# Altium PCB DIOT_Template.PcbDoc (part 2 of 4)
Units mm, origin at the board's own origin, x right, y up, seen from the top; angles counter-clockwise.
Board outline 222.9 x 100 mm, 4 copper layers (L1, P2, P3, L4), stack 1.546 mm thick; 233 components, 184 nets, 1067 pads, 325 vias.
Unrouted connection lines stored in the file: 423.
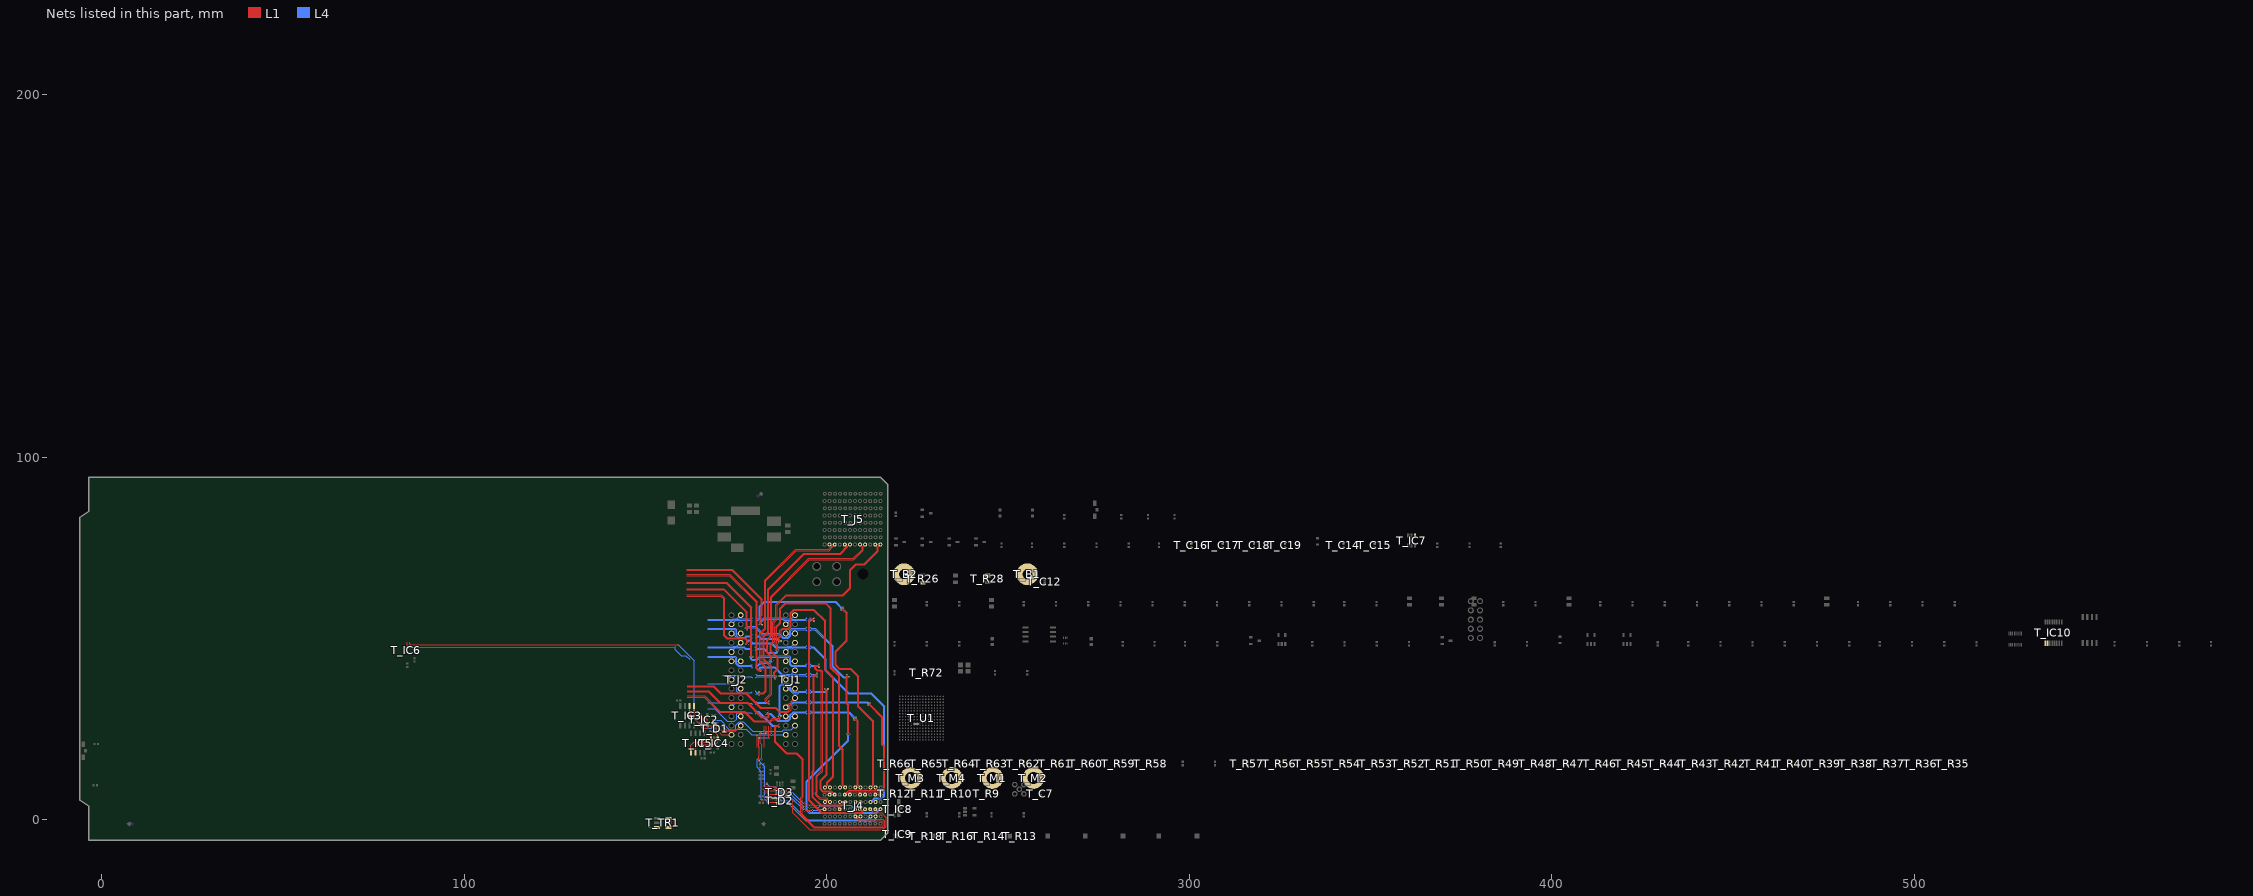
[diagram p4: the nets of this part, all layers, seen from the top]

## Part data
FTG1 FTG4: library part FIDUCIAL_TARGET_C100-200, "Fiducial Target", Author="CERN DEM JLC", Component Type="Standard (No BOM)", ComponentHeight=0mm, CreateDate=09.02.2010, Family=Fiducial, HelpURL=Undefined, LatestRevisionDate=04.04.2012, Mounted=No, PackageDescription="Round Fiducial Target, Top Layer, 1.0mm, Top Solder 2.0mm, Keepout =2.0mm", Part Description="Round Fiducial Target, Top Layer, 1.0mm, Top Solder 2.0mm, Keepout =2.0mm", Part Number=FIDUCIAL_TARGET_C100-200, Pin Count=1, Sense=No, SMD=Yes, Socket=No, Status=None
FTG2 FTG3 FTG5 FTG6: library part FIDUCIAL_TARGET_S100-200, "Fiducial Target", Author="CERN DEM JLC", Component Type="Standard (No BOM)", ComponentHeight=0mm, CreateDate=09.02.2010, Family=Fiducial, HelpURL=Undefined, LatestRevisionDate=04.04.2012, Mounted=No, PackageDescription="Square Fiducial Target, Top Layer, 1.0mm, Top Solder 2.0mm, Keepout =2.0mm", Part Description="Square Fiducial Target, Top Layer, 1.0mm, Top Solder 2.0mm, Keepout =2.0mm", Part Number=FIDUCIAL_TARGET_S100-200, Pin Count=1, Sense=No, SMD=Yes, Socket=No, Status=None
T_B1 T_B2: library part PLATED_HOLE2.7_PAD6.0, "Single Terminal Socket", Author="CERN DEM HF", Component Type="Standard (No BOM)", ComponentHeight=0mm, CreateDate=28.08.2024, Family="Plated Hole", HelpURL=Undefined, LatestRevisionDate=28.08.2024, Mounted=No, PackageDescription="Plated Through Hole: Hole Dia.=2.7mm Pad Dia.=6.0mm", Part Description="Plated Through Hole: Hole Dia.=2.7mm Pad Dia.=6.0mm", Part Number=PLATED_HOLE2.7_PAD6.0, Pin Count=1, Sense=No, SMD=No, Socket=No, Status=None
T_C1 T_C2 T_C27 T_C32 T_C40 T_C41 T_C54 T_C55 T_C57: library part CC0805_4.7UF_16V_10%_X7R, "Non-polarised capacitor", Case=0805, Manufacturer=GENERIC, Manufacturer1 ComponentHeight=1.35mm, Manufacturer1 Example="TAIYO YUDEN", Manufacturer1 Part Number=EMK212B7475KG-T, Tolerance=±10%, Voltage=16V, Author="CERN DEM JLC", Component Type=Standard, CreateDate=16.09.2014, HelpURL=\\cern.ch\dfs\Applications\Altium\Datasheets\CC0805_X7R_TAIYO-YUDEN_HIGH-VALUE.pdf, LatestRevisionDate=16.09.2014, Manufacturer Part Number=CC0805_4.7UF_16V_10%_X7R, Mounted=Yes, Part Description="SMD Multilayer Chip Ceramic Capacitor", Part Number=CC0805_4.7UF_16V_10%_X7R, Pin Count=2, Sense=No, SMD=Yes, Socket=No, Status=Preferred, TC=X7R
T_C3 T_C4 T_C5 T_C6 T_C7 T_C8 T_C14 T_C15 T_C20 T_C21 T_C22 T_C23 T_C24 T_C25 T_C26 T_C28 T_C29 T_C30 T_C31 T_C33 T_C34 T_C35 T_C36 T_C37 T_C38 T_C39 T_C42 T_C43 T_C44 T_C45 T_C46 T_C47 T_C48 T_C49 T_C50 T_C51 T_C52 T_C53 T_C56 T_C58 T_C59 T_C60 T_C61 T_C62 T_C63 T_C64: library part CC0402_100NF_50V_10%_X7R, "Non-polarised capacitor", Case=0402, Manufacturer=GENERIC, Manufacturer1 ComponentHeight=0.55mm, Manufacturer1 Example=MURATA, Manufacturer1 Part Number=GRM155R71H104KE14D, Tolerance=±10%, Voltage=50V, Author="CERN DEM MR", Component Type=Standard, CreateDate=30.06.2017, HelpURL=\\cern.ch\dfs\Applications\Altium\Datasheets\CC0402_MURATA_GRM155R71H104KE14D.pdf, LatestRevisionDate=30.06.2017, Manufacturer Part Number=CC0402_100NF_50V_10%_X7R, Mounted=Yes, Part Description="SMD Multilayer Chip Ceramic Capacitor", Part Number=CC0402_100NF_50V_10%_X7R, Pin Count=2, Sense=No, SMD=Yes, Socket=No, Status=None, TC=X7R
T_C9 T_C10 T_C11: library part CC0805_10UF_25V_10%_X5R, "Non-polarised capacitor", Case=0805, Manufacturer=GENERIC, Manufacturer1 ComponentHeight=0.95mm, Manufacturer1 Example=MURATA, Manufacturer1 Part Number=GRM219R61E106KA12D, Tolerance=±10%, Voltage=25V, Author="CERN DEM JLC", Component Type=Standard, CreateDate=25.10.2012, HelpURL=\\cern.ch\dfs\Applications\Altium\Datasheets\CC0805_X5R_MURATA_GRM.pdf, LatestRevisionDate=06.09.2016, Manufacturer Part Number=CC0805_10UF_25V_10%_X5R, Mounted=Yes, Part Description="SMD Multilayer Chip Ceramic Capacitor", Part Number=CC0805_10UF_25V_10%_X5R, Pin Count=2, Sense=No, SMD=Yes, Socket=No, Status=Preferred, TC=X5R
T_C12: library part CC0402_22PF_50V_5%_C0G, "Non-polarised capacitor", Case=0402, Manufacturer=GENERIC, Manufacturer1 ComponentHeight=0.55mm, Manufacturer1 Example=KEMET, Manufacturer1 Part Number=C0402C220J5GACTU, Tolerance=±5%, Voltage=50V, Author="CERN DEM JLC", Component Type=Standard, CreateDate=2007-12-03, HelpURL="\\cern.ch\dfs\Applications\Altium\Datasheets\CC0402_C0G_KEMET_(Commercial Grade).pdf", LatestRevisionDate=2007-12-03, Manufacturer Part Number=CC0402_22PF_50V_5%_C0G, Mounted=Yes, Part Description="SMD Multilayer Chip Ceramic Capacitor", Part Number=CC0402_22PF_50V_5%_C0G, Pin Count=2, Sense=No, SMD=Yes, Socket=No, Status=Preferred, TC=C0G/NP0
T_C13 T_C16 T_C17 T_C18 T_C19: library part CC0402_10NF_50V_5%_X7R, "Non-polarised capacitor", Case=0402, Manufacturer=GENERIC, Manufacturer1 ComponentHeight=0.55mm, Manufacturer1 Example=KEMET, Manufacturer1 Part Number=C0402C103J5RAC, Tolerance=±5%, Voltage=50V, Author="CERN DEM BC", Component Type=Standard, CreateDate=15.07.2020, HelpURL=\\cern.ch\dfs\Applications\Altium\Datasheets\CC0402_X7R_KEMET.pdf, LatestRevisionDate=15.07.2020, Manufacturer Part Number=CC0402_10NF_50V_5%_X7R, Mounted=Yes, Part Description="SMD Multilayer Chip Ceramic Capacitor", Part Number=CC0402_10NF_50V_5%_X7R, Pin Count=2, Sense=No, SMD=Yes, Socket=No, Status=Preferred, TC=X7R
T_D1 T_D2 T_D3 T_D4: library part CMP-004-00037-2, "Diode TVS Quint Common Anode Uni-Dir 3.3V 40W 6-Pin SLP EP T/R", Max Operating Temperature=125°C, Min Operating Temperature=-55°C, Mounting Technology="Surface Mount", Pins=6
T_D5: "Zener Diode", Case=DO-214AA, Manufacturer="FAIRCHILD SEMICONDUCTOR", Power=600W, Voltage=12V, Author="CERN DEM JLC", Bonding=No, Component Type=Standard, ComponentHeight=2.65mm, CreateDate=10.04.2013, Device=SMBJ12A, HelpURL=\\cern.ch\dfs\Applications\Altium\Datasheets\SMBJ.pdf, LatestRevisionDate=10.04.2013, Manufacturer Part Number=SMBJ12A, Mounted=Yes, PackageDescription="DO-214-AA/SMB Diode, Molded Body; 5.34mm L X 3.625mm W X 2.65mm H, IPC Medium Density", Part Description="Uni-Directional Transient Voltage Suppressor Diode", Part Number=SMBJ12A, Pin Count=2, PressFit=No, Sense=No, SMD=Yes, Socket=No
T_D6 T_D7: "Schottky Diode", Case=SOD-523F, Manufacturer=COMCHIP, Power=500mA, Voltage=20V, Author="CERN DEM HF", Bonding=No, Component Type=Standard, ComponentHeight=1mm, CreateDate=13.10.2023, Device=CDBU0520-HF, HelpURL=\\cern.ch\dfs\Applications\Altium\Datasheets\CDBU0520-HF.pdf, LatestRevisionDate=13.10.2023, Manufacturer Part Number=CDBU0520-HF, Mounted=Yes, PackageDescription="Small Outline Diode Flat Lead (SOD-523F), Body; 1.80mm L X 1mm W X 0.85mm H", Part Description="20V Surface mount Schottky Barrier Diode", Part Number=CDBU0520-HF, Pin Count=2, PressFit=No, Sense=No, SMD=Yes, Socket=No
T_FL1: library part FIL_MURATA_BNX022-01L, "Block Type EMIFIL (LC Combined)", Manufacturer=MURATA, Manufacturer Part Number=BNX022-01L, Resistance=0.5R, Author="CERN DEM JLC", Component Type=Standard, ComponentHeight=3.3mm, CreateDate=10.10.2012, HelpURL=\\cern.ch\dfs\Applications\Altium\Datasheets\FIL_MURATA_BNX022-01L.pdf, LatestRevisionDate=10.10.2012, Mounted=Yes, Part Description="Block Type EMIFIL (LC Combined) SMD Type, BNX02* Series", Part Number=FIL_MURATA_BNX022-01L, Pin Count=2, Sense=No, SMD=Yes, Socket=No, Status=None
T_IC1: "150-mA, 30-V, 1-µA IQ Voltage Regulators with Enable", Case=SOT23-5, Manufacturer="TEXAS INSTRUMENTS", Author="CERN DEM JLC", Bonding=No, Component Type=Standard, ComponentHeight=1.45mm, CreateDate=17.03.2011, Device=TPS70933DBV, HelpURL=\\cern.ch\dfs\Applications\Altium\Datasheets\TPS709.pdf, LatestRevisionDate=17.03.2011, Manufacturer Part Number=TPS70933DBV, Mounted=Yes, PackageDescription="SOT23, 0.95mm Pitch; 5 Pin, 1.60mm W X 2.90mm L X 1.45mm H body, IPC Medium Density", Part Description="3.3V, 150-mA, 30-V, 1-µA IQ Voltage Regulators with Enable", Part Number=TPS70933DBV, Pin Count=5, PressFit=No, Sense=No, SMD=Yes, Socket=No
T_IC2 T_IC4: "1.7V-5.5V, 2K I2C Serial EEPROM With EUI-48 Node Identity", Case=SOT23-5, Manufacturer="MICROCHIP TECHNOLOGY", Author="CERN DEM MR", Bonding=No, Component Type=Standard, ComponentHeight=1.45mm, CreateDate=31.03.2016, Device=24AA02E48T-I/OT, HelpURL=\\cern.ch\dfs\Applications\Altium\Datasheets\24AA02E48T-I-OT.pdf, LatestRevisionDate=31.03.2016, Manufacturer Part Number=24AA02E48T-I/OT, Mounted=Yes, PackageDescription="SOT, 0.95mm pitch; 5 pin, 1.60mm W X 2.90mm L X 1.45mm H body, IPC Medium Density", Part Description="1.7V-5.5V, 2K I2C Serial EEPROM with EUI-48 Node Identity", Part Number=24AA02E48T-I/OT, Pin Count=5, PressFit=No, Sense=No, SMD=Yes, Socket=No
T_IC3 T_IC5: "1.7V-5.5V, 2K I2C™ Serial EEPROMs with EUI-48™ Node Identity", Case=SOIC8, Manufacturer="MICROCHIP TECHNOLOGY", Author="CERN DEM MR", Bonding=No, Component Type=Standard, ComponentHeight=1.75mm, CreateDate=19.07.2016, Device=24AA025E48-I/SN, HelpURL=\\cern.ch\dfs\Applications\Altium\Datasheets\24AA025E48-I-SN.pdf, LatestRevisionDate=19.07.2016, Manufacturer Part Number=24AA025E48-I/SN, Mounted=Yes, PackageDescription="SOIC 8, Pitch 1.27mm - Body 4x5mm, IPC Medium Density", Part Description="1.7V-5.5V, 2K I2C™ Serial EEPROMs with EUI-48™ Node Identity", Part Number=24AA025E48-I/SN, Pin Count=8, PressFit=No, Sense=No, SMD=Yes, Socket=No
T_IC6: library part CMP-010-00651-1, "Automotive, ±0.4°C accurate I²C temperature sensor with alert option 6-SOT-5X3 -40 to 125", Manufacturer="Texas Instruments", Manufacturer Part Number=TMP112DQDRLRQ1, Pins=6
T_IC7: "Low Quiescent Current, Programmable-Delay Supervisory Circuit", Case=SOT23-6, Manufacturer="TEXAS INSTRUMENTS", Manufacturer Part Number=TPS3808G01DBV, Author="CERN DEM JLC", Bonding=No, Component Type=Standard, ComponentHeight=1.45mm, CreateDate=22.10.2008, Device=TPS3808G01DBVT, HelpURL=\\cern.ch\dfs\Applications\Altium\Datasheets\TPS3808G01DBVT.pdf, LatestRevisionDate=10.06.2022, Mounted=Yes, PackageDescription="SOT, 0.95mm Pitch; 6 Pin, 1.60mm W X 2.90mm L X 1.45mm H body, IPC Medium Density", Part Description="Adjustable Low Quiescent Current, Programmable-Delay Supervisory Circuit", Part Number=TPS3808G01DBVT, Pin Count=6, PressFit=No, Sense=No, SMD=Yes, Socket=No
T_IC8 T_IC9: library part CMP-015-00014-1, "Dual Supply 2-Bit Voltage Translator/Buffer/Repeater Isolator for I2C Applications", Manufacturer=Onsemi, Max Operating Temperature=85°C, Max Supply Voltage=5.5V, Min Operating Temperature=-40°C, Min Supply Voltage=1.65V, Manufacaturer Part Number=FXMA2102UMX, Mounting Technology="Surface Mount", Pins=8
T_IC10: "I2C-bus to SPI bridge", Case=TSSOP16, Manufacturer="NXP SEMICONDUCTORS", Author=GK, Bonding=No, Component Type=Standard, ComponentHeight=1.1mm, CreateDate=14/12/2015, Device=SC18IS606PWJ, HelpURL=\\cern.ch\dfs\Applications\Altium\Datasheets\SC18IS602B.pdf, LatestRevisionDate=14/12/2015, Manufacturer Part Number=SC18IS606PWJ, Mounted=Yes, PackageDescription="SOP, 0.65mm pitch; 16 pin, 4.40mm W X 5.00mm L X 1.10mm H body IPC Medium Density", Part Description="I2C-Bus to SPI Bridge", Part Number=SC18IS606PWJ, Pin Count=16, PressFit=No, Sense=No, SMD=Yes, Socket=No
T_IC11: library part MEM_AT25SF081B-SHB, "8M-bit Serial Flash Memory with uniform 4KB sectors and Dual/Quad SPI and QPI", Case=SOIC8, Manufacturer=Renesas, Author=GK, Bonding=No, Component Type=Standard, ComponentHeight=2.16mm, CreateDate=26/01/2018, Device=AT25SF081B-SHB, HelpURL=\\cern.ch\dfs\Applications\Altium\Datasheets\W25Q128FVSIG.pdf, LatestRevisionDate=26/01/2018, Manufacturer Part Number=AT25SF081B-SHB, Mounted=Yes, PackageDescription="SOIC, 1.27mm Pitch; 8 Pin, 5.285mm W X 5.335mm L X 2.16mm H body, IPC Medium Density", Part Description="8M-bit Serial Flash Memory with uniform 4KB sectors and Dual/Quad SPI and QPI", Part Number=AT25SF081B-SHB, Pin Count=8, PressFit=No, Sense=No, SMD=Yes, Socket=No
T_IC12: "Integrated Circuit", Manufacturer_Name="Texas Instruments", Mouser Part Number=595-TMUX1574DYYR, Arrow Part Number=TMUX1574DYYR, Arrow Price/Stock=https://www.arrow.com/en/products/tmux1574dyyr/texas-instruments.html?utm_currency=USD&region=nac, Datasheet Link=https://www.ti.com/lit/gpn/TMUX1574, Height=1.1mm, Manufacturer_Part_Number=TMUX1574DYYR, Mouser Price/Stock=https://www.mouser.co.uk/ProductDetail/Texas-Instruments/TMUX1574DYYR?qs=B6kkDfuK7%2FDgs0e8M6dtlw%3D%3D
T_IC13 T_IC15: "Single Bus Buffer Gate With 3-State Output", Case=SOT23-5, Manufacturer="TEXAS INSTRUMENTS", Author="CERN DEM HF", Bonding=No, Component Type=Standard, ComponentHeight=1.45mm, CreateDate=15.11.2022, Device=SN74LVC1G125DBV, HelpURL=\\cern.ch\dfs\Applications\Altium\Datasheets\SN74LVC1G125.pdf, LatestRevisionDate=15.11.2022, Manufacturer Part Number=SN74LVC1G125DBV, Mounted=Yes, PackageDescription="SOT, 0.95mm Pitch; 5 Pin, 1.60mm W X 2.90mm L X 1.45mm H body, IPC Medium Density", Part Description="Single Bus Buffer Gate with 3-State Outputs", Part Number=SN74LVC1G125DBV, Pin Count=5, PressFit=No, Sense=No, SMD=Yes, Socket=No
T_IC14: "Single 2-Input AND Gate", Case=SOT23-5, Manufacturer="TEXAS INSTRUMENTS", Author="CERN DEM JLC", Bonding=No, Component Type=Standard, ComponentHeight=1.45mm, CreateDate=28.08.2012, Device=SN74LVC1G08DBV, HelpURL=\\cern.ch\dfs\Applications\Altium\Datasheets\SN74LVC1G08.pdf, LatestRevisionDate=27.10.2021, Manufacturer Part Number=SN74LVC1G08DBV, Mounted=Yes, PackageDescription="SOT, 0.95mm Pitch; 5 Pin, 1.60mm W X 2.90mm L X 1.45mm H body, IPC Medium Density", Part Description="Single 2-Input Positive-AND Gate", Part Number=SN74LVC1G08DBV, Pin Count=5, PressFit=No, Sense=No, SMD=Yes, Socket=No
T_J1 T_J2: library part 3M_N2530-6002RB, "Connector 30 Male", Manufacturer=3M, Manufacturer Part Number=N2530-6002RB, Author="CERN DEM JLC", Component Type=Standard, ComponentHeight=10.03mm, CreateDate=11.02.2009, Family="Header 30", HelpURL=\\cern.ch\dfs\Applications\Altium\Datasheets\3M_N2530-6002RB.pdf, LatestRevisionDate=11.08.2009, Mounted=Yes, Part Description="30 Contacts - Straight .100'' x .100'' Low Profile Four-Wall Header, 2500 Series", Part Number=3M_N2530-6002RB, Pin Count=30, PressFit=No, Sense=No, SMD=No, Socket=No, Status=None
T_J3: library part SAMTEC_MMCX-J-P-H-ST-TH1, Manufacturer=SAMTEC, Manufacturer Part Number=MMCX-J-P-H-ST-TH1, Author="CERN DEM JLC", Component Type=Standard, ComponentHeight=4.35mm, CreateDate=05.12.2012, HelpURL=\\cern.ch\dfs\Applications\Altium\Datasheets\SAMTEC_MMCX-J-P-H-ST-TH1.pdf, LatestRevisionDate=05.12.2012, Mounted=Yes, Part Description="Straight Through-hole 50 Ohm Micro Mini RF Jack, MMCX Series", Part Number=SAMTEC_MMCX-J-P-H-ST-TH1, Pin Count=2, PressFit=No, Sense=No, SMD=No, Socket=No, Status=None
T_J4: library part AMPHENOL_10052825-101LF, "72 Contacts Header, 6 Columns, 4 Pairs per Column", Manufacturer=AMPHENOL, Manufacturer Part Number=10052825-101LF, Author="CERN DEM MR", ClassName=Overlapping, Component Type=Standard, ComponentHeight=15.35mm, ComponentLink1Description=Application, ComponentLink1URL=\\cern.ch\dfs\Applications\Altium\Datasheets\AMPHENOL_10052825-101LF_Application.pdf, CreateDate=19/02/2018, Family="AirMax VS", HelpURL=\\cern.ch\dfs\Applications\Altium\Datasheets\AMPHENOL_10052825-101LF.pdf, LatestRevisionDate=19/02/2018, Mounted=Yes, Part Description="72 Contacts, 2mm Pitch, 6 Columns, 4 Pairs per Column, 4 Walls, Right Angle Header", Part Number=AMPHENOL_10052825-101LF, Pin Count=72, PressFit=Yes, Sense=No, SMD=No, Socket=No, Status=None
T_J5: library part AMPHENOL_10052838-101LF, "96 Contacts Header, 8 Columns, 4 Pairs per Column", Manufacturer=AMPHENOL, Manufacturer Part Number=10052838-101LF, Author="CERN DEM MR", Component Type=Standard, ComponentHeight=15.35mm, ComponentLink1Description=Application, ComponentLink1URL=\\cern.ch\dfs\Applications\Altium\Datasheets\AMPHENOL_10052838-101LF_Application.pdf, CreateDate=19.02.2018, Family="AirMax VS", HelpURL=\\cern.ch\dfs\Applications\Altium\Datasheets\AMPHENOL_10052838-101LF.pdf, LatestRevisionDate=19.02.2018, Mounted=Yes, Part Description="96 Contacts, 2mm Pitch, 8 Columns, 4 Pairs per Column, 4 Walls, Right Angle Header", Part Number=AMPHENOL_10052838-101LF, Pin Count=96, PressFit=Yes, Sense=No, SMD=No, Socket=No, Status=None
T_J6: library part MOLEX_39-30-0040, "Connector 4 Male", Manufacturer=MOLEX, Manufacturer Part Number=39-30-0040, Author="CERN DEM JLC", Component Type=Standard, ComponentHeight=11.4mm, CreateDate=2018-10-02, Family="Mini-Fit Jr.™", HelpURL=\\cern.ch\dfs\Applications\Altium\Datasheets\MOLEX_39-30-0040.pdf, LatestRevisionDate=2018-10-02, Mounted=Yes, Part Description="4.20mm (.165\") Pitch Mini-Fit Jr. Header, Dual Row, Right Angle with Snap-in Plastic Peg PCB Lock, 4 Circuits", Part Number=MOLEX_39-30-0040, Pin Count=4, PressFit=No, Sense=No, SMD=No, Socket=No, Status=None
T_J7: library part HARWIN_M20-9980546, "Connector 10 Male", Manufacturer=HARWIN, Manufacturer Part Number=M20-9980546, Author="CERN DEM MR", Component Type=Standard, ComponentHeight=8.64mm, CreateDate=9/15/2017, Family="Header 10", HelpURL=\\cern.ch\dfs\Applications\Altium\Datasheets\HARWIN_M20-9980546.pdf, LatestRevisionDate=9/15/2017, Mounted=Yes, Part Description="10 Contacts - Pitch 2.54mm - Dual Row Straight Header (Lead Length 6.1mm, Insulator 2.54mm)", Part Number=HARWIN_M20-9980546, Pin Count=10, PressFit=No, Sense=No, SMD=No, Socket=No, Status=None
T_LD1 T_LD5: library part LED_AVAGO_HSMC-C110, "LED Red 1C 2A", Case=1206, Manufacturer="AVAGO TECHNOLOGIES", Manufacturer Part Number=HSMC-C110, Author="CERN DEM JMW", Bonding=No, Color=Red, Component Type=Standard, ComponentHeight=1.1mm, ComponentLink1Description="Design Guide", ComponentLink1URL=\\cern.ch\dfs\Applications\Altium\Datasheets\LED_AVAGO_HSMC-C110_DESIGN-GUIDE.pdf, CreateDate=30.07.2009, HelpURL=\\cern.ch\dfs\Applications\Altium\Datasheets\LED_AVAGO_HSMC-C110.pdf, LatestRevisionDate=20.06.2012, Mounted=Yes, PackageDescription="Red Chip LED, 2-Leads, Body 3.3x1.6mm, Side Emitting Package", Part Description="High Performance Right Angle Chip Red LED", Part Number=LED_AVAGO_HSMC-C110, Pin Count=2, PressFit=No, Sense=No, SMD=Yes, Socket=No, Status="Not Recommended"
T_LD2: library part LED_AVAGO_HSME-C110, "LED Green 1C 2A", Case=1206, Manufacturer="AVAGO TECHNOLOGIES", Manufacturer Part Number=HSME-C110, Author="CERN DEM JMW", Bonding=No, Color=Green, Component Type=Standard, ComponentHeight=1.1mm, ComponentLink1Description="Design Guide", ComponentLink1URL=\\cern.ch\dfs\Applications\Altium\Datasheets\LED_AVAGO_HSME-C110_DESIGN-GUIDE.pdf, CreateDate=30.07.2009, HelpURL=\\cern.ch\dfs\Applications\Altium\Datasheets\LED_AVAGO_HSME-C110.pdf, LatestRevisionDate=20.06.2012, Mounted=Yes, PackageDescription="Green Chip LED, 2-Leads, Body 3.3x1.6mm, Side Emitting Package", Part Description="High Performance Right Angle Chip Green LED", Part Number=LED_AVAGO_HSME-C110, Pin Count=2, PressFit=No, Sense=No, SMD=Yes, Socket=No, Status="Not Recommended"
T_LD3 T_LD4: library part LED_KINGBRIGHT_KPH-1608CGCK, "LED Green 1C 2A", Manufacturer=KINGBRIGHT, Manufacturer Part Number=KPH-1608CGCK, Author="CERN DEM JLC", Bonding=No, Color=Green, Component Type=Standard, ComponentHeight=0.65mm, CreateDate=03.07.2017, HelpURL=\\cern.ch\dfs\Applications\Altium\Datasheets\LED_KINGBRIGHT_KPH-1608CGCK.pdf, LatestRevisionDate=03.07.2017, Mounted=Yes, PackageDescription="SMT Green LED, Case 0603, Body L 1.6 x W 0.8mm H 0.65mm", Part Description="SMD Green LED, Case 1.6mmX0.8mm(0603), 0.65mm Thickness", Part Number=LED_KINGBRIGHT_KPH-1608CGCK, Pin Count=2, PressFit=No, Sense=No, SMD=Yes, Socket=No
T_M1 T_M2 T_M3 T_M4: library part CMP-00028-00019-2, "PTH  Hole 3.4, 6mm pad", Pins=1
T_OSC1: library part OSC_25MHZ_IQD_LFSPXO025165, "Oscillator 4 pins 1=E 2=GND 3=OUT 4=+Vs", Manufacturer="IQD FREQUENCY PRODUCTS", Manufacturer Part Number=LFSPXO025165, Author="CERN DEM JLC", Bonding=No, Component Type=Standard, ComponentHeight=1.2mm, CreateDate=02.12.2010, HelpURL=\\cern.ch\dfs\Applications\Altium\Datasheets\OSC_IQD_LFSPXO025165.pdf, LatestRevisionDate=03.11.2016, Mounted=Yes, PackageDescription="Oscillator, Corner Concave, 2.20mm Pitch, 4 Pins, 2.70mm L X 3.40mm W X 1.20mm H, CFPS-39 Series", Part Description="3.3V, ±50ppm, 15pF, -40 to 85°C, CMOS Surface Mount Clock Oscillator (CFPS-39 Series)", Part Number=OSC_25MHZ_IQD_LFSPXO025165, Pin Count=4, PressFit=No, Sense=No, SMD=Yes, Socket=No
T_R1 T_R5 T_R6 T_R100: library part R0402_1K6_1%_0.0625W_100PPM, "Resistor - 1%", Case=0402, Manufacturer=GENERIC, Manufacturer1 ComponentHeight=0.4mm, Manufacturer1 Example="YAGEO PHYCOMP", Manufacturer1 Part Number=232270671602L, Power=0.0625W, Tolerance=±1%, Author="CERN DEM JLC", Component Type=Standard, CreateDate=03.12.2007, HelpURL=\\cern.ch\dfs\Applications\Altium\Datasheets\R0402_Phycomp_RC0402.pdf, LatestRevisionDate=17.10.2012, Manufacturer Part Number=R0402_1K6_1%_0.0625W_100PPM, Mounted=Yes, Part Description="General Purpose Thick Film Chip Resistor", Part Number=R0402_1K6_1%_0.0625W_100PPM, Pin Count=2, PressFit=No, Sense=No, SMD=Yes, Socket=No, Status="Not Recommended", TC=±100ppm/°C
T_R2 T_R4 T_R9 T_R10 T_R11 T_R12 T_R25 T_R35 T_R36 T_R37 T_R38 T_R39 T_R40 T_R41 T_R42 T_R43 T_R44 T_R45 T_R46 T_R47 T_R48 T_R49 T_R50 T_R51 T_R52 T_R53 T_R54 T_R55 T_R56 T_R57 T_R58 T_R59 T_R60 T_R61 T_R62 T_R63 T_R64 T_R65 T_R66 T_R79 T_R80 T_R81 T_R82 T_R83 T_R98: library part R0402_0R_JUMPER, "Resistor", Case=0402, Manufacturer=GENERIC, Manufacturer1 ComponentHeight=0.4mm, Manufacturer1 Example="YAGEO PHYCOMP", Manufacturer1 Part Number=232270591001L, Author="CERN DEM JLC", Component Type=Standard, CreateDate=03.12.2007, HelpURL=\\cern.ch\dfs\Applications\Altium\Datasheets\R0402_Phycomp_RC0402.pdf, LatestRevisionDate=17.10.2012, Manufacturer Part Number=R0402_0R_JUMPER, Mounted=Yes, Part Description="1A (0.05R Max DC Resistance) Zero Ohm Jumper", Part Number=R0402_0R_JUMPER, Pin Count=2, Sense=No, SMD=Yes, Socket=No
  T_R2 T_R4 T_R9 T_R10 T_R11 T_R12 T_R35 T_R36 T_R37 T_R38 T_R39 T_R40 T_R41 T_R42 T_R43 T_R44 T_R45 T_R46 T_R47 T_R48 T_R49 T_R50 T_R51 T_R52 T_R53 T_R54 T_R55 T_R56 T_R57 T_R58 T_R59 T_R60 T_R61 T_R62 T_R63 T_R64 T_R65 T_R66 T_R79 T_R80 T_R81 T_R82 T_R83 T_R98: PressFit=No, Status="Not Recommended"
  T_R25: Status="Not recommended"
T_R3 T_R7 T_R8 T_R31 T_R32 T_R33 T_R34 T_R67 T_R68 T_R69 T_R70 T_R71 T_R75 T_R76 T_R77 T_R78 T_R84 T_R87 T_R88 T_R99 T_R101: library part R0402_10K_1%_0.0625W_100PPM, "Resistor - 1%", Case=0402, Manufacturer=GENERIC, Manufacturer1 ComponentHeight=0.4mm, Manufacturer1 Example="YAGEO PHYCOMP", Manufacturer1 Part Number=232270671003L, Power=0.0625W, Tolerance=±1%, Author="CERN DEM JLC", Component Type=Standard, HelpURL=\\cern.ch\dfs\Applications\Altium\Datasheets\R0402_Phycomp_RC0402.pdf, Manufacturer Part Number=R0402_10K_1%_0.0625W_100PPM, Mounted=Yes, Part Description="General Purpose Thick Film Chip Resistor", Part Number=R0402_10K_1%_0.0625W_100PPM, Pin Count=2, SMD=Yes, Socket=No, TC=±100ppm/°C
  T_R3 T_R7 T_R8 T_R31 T_R32 T_R33 T_R34 T_R67 T_R68 T_R69 T_R70 T_R71: CreateDate=03.12.2007, LatestRevisionDate=17.10.2012, PressFit=No, Sense=No, Status="Not Recommended"
  T_R75 T_R76 T_R77 T_R78 T_R84 T_R87 T_R88 T_R99 T_R101: CreateDate=2007-12-03, LatestRevisionDate=2012-10-17, Status="Not recommended", Table="Resistors SMD"
T_R13 T_R14 T_R15 T_R16 T_R17 T_R18 T_R20 T_R21 T_R22 T_R23 T_R24 T_R72: library part R0402_22R_1%_0.0625W_100PPM, "Resistor - 1%", Case=0402, Manufacturer=GENERIC, Manufacturer1 ComponentHeight=0.4mm, Manufacturer1 Example="YAGEO PHYCOMP", Manufacturer1 Part Number=232270672209L, Power=0.0625W, Tolerance=±1%, Author="CERN DEM JLC", Component Type=Standard, HelpURL=\\cern.ch\dfs\Applications\Altium\Datasheets\R0402_Phycomp_RC0402.pdf, Manufacturer Part Number=R0402_22R_1%_0.0625W_100PPM, Mounted=Yes, Part Description="General Purpose Thick Film Chip Resistor", Part Number=R0402_22R_1%_0.0625W_100PPM, Pin Count=2, PressFit=No, Sense=No, SMD=Yes, Socket=No, Status="Not Recommended"
  T_R13 T_R14 T_R15 T_R16 T_R17 T_R18 T_R20 T_R21 T_R22 T_R23 T_R24: CreateDate=03.12.2007, LatestRevisionDate=17.10.2012
  T_R72: CreateDate=03/12/2007, LatestRevisionDate=17/10/2012, TC=±100ppm/°C
T_R19: library part R0402_200R_1%_0.0625W_100PPM, "Resistor - 1%", Case=0402, Manufacturer=GENERIC, Manufacturer1 ComponentHeight=0.4mm, Manufacturer1 Example="YAGEO PHYCOMP", Manufacturer1 Part Number=232270672001L, Power=0.0625W, Tolerance=±1%, Author="CERN DEM JLC", Component Type=Standard, CreateDate=2007-12-03, HelpURL=\\cern.ch\dfs\Applications\Altium\Datasheets\R0402_Phycomp_RC0402.pdf, LatestRevisionDate=2012-10-17, Manufacturer Part Number=R0402_200R_1%_0.0625W_100PPM, Mounted=Yes, Part Description="General Purpose Thick Film Chip Resistor", Part Number=R0402_200R_1%_0.0625W_100PPM, Pin Count=2, PressFit=No, Sense=No, SMD=Yes, Socket=No, Status="Not Recommended", TC=±100ppm/°C
T_R26: library part R0805_1M1_1%_0.125W_100PPM, "Resistor - 1%", Case=0805, Manufacturer=GENERIC, Manufacturer1 ComponentHeight=0.6mm, Manufacturer1 Example="NIC COMPONENT", Manufacturer1 Part Number=NRC10F1104TRF, Author="CERN DEM JLC", Component Type=Standard, CreateDate=03/12/2007, HelpURL=\\cern.ch\dfs\Applications\Altium\Datasheets\R0805_NIC_NRC.pdf, LatestRevisionDate=13/03/2008, Manufacturer Part Number=R0805_1M1_1%_0.125W_100PPM, Mounted=Yes, Part Description="General Purpose Thick Film Chip Resistor", Part Number=R0805_1M1_1%_0.125W_100PPM, Pin Count=2, PressFit=No, Sense=No, SMD=Yes, Socket=No, Status=Preferred
T_R27 T_R28: library part "R0805_10M_1%_0.125W_100PPM_VISHAY_CRCW e3", "Resistor - 1%", Case=0805, Manufacturer="VISHAY DALE", Manufacturer Part Number=CRCW080510M0FKEA, Power=0.125W, Tolerance=±1%, Author="CERN DEM BC", Component Type=Standard, ComponentHeight=0.5mm, CreateDate=2019-11-12, HelpURL="\\cern.ch\dfs\Applications\Altium\Datasheets\R0805_VISHAY_CRCW e3.pdf", LatestRevisionDate=2019-11-12, Mounted=Yes, Part Description="150V, Standard Thick Film Chip Resistor", Part Number="R0805_10M_1%_0.125W_100PPM_VISHAY_CRCW e3", Pin Count=2, PressFit=No, Sense=No, SMD=Yes, Socket=No, Status=None, TC=±100ppm/°C
T_R29 T_R86: library part R0402_100K_1%_0.0625W_100PPM, "Resistor - 1%", Case=0402, Manufacturer=GENERIC, Manufacturer1 ComponentHeight=0.4mm, Manufacturer1 Example="YAGEO PHYCOMP", Manufacturer1 Part Number=232270671004L, Power=0.0625W, Tolerance=±1%, Author="CERN DEM JLC", Component Type=Standard, CreateDate=03.12.2007, HelpURL=\\cern.ch\dfs\Applications\Altium\Datasheets\R0402_Phycomp_RC0402.pdf, LatestRevisionDate=17.10.2012, Manufacturer Part Number=R0402_100K_1%_0.0625W_100PPM, Mounted=Yes, Part Description="General Purpose Thick Film Chip Resistor", Part Number=R0402_100K_1%_0.0625W_100PPM, Pin Count=2, PressFit=No, Sense=No, SMD=Yes, Socket=No, Status="Not Recommended", TC=±100ppm/°C
T_R30: library part R0402_3K9_1%_0.0625W_100PPM, "Resistor - 1%", Case=0402, Manufacturer=GENERIC, Manufacturer1 ComponentHeight=0.4mm, Manufacturer1 Example="YAGEO PHYCOMP", Manufacturer1 Part Number=232270673902L, Power=0.0625W, Tolerance=±1%, Author="CERN DEM JLC", Component Type=Standard, CreateDate=03.12.2007, HelpURL=\\cern.ch\dfs\Applications\Altium\Datasheets\R0402_Phycomp_RC0402.pdf, LatestRevisionDate=17.10.2012, Manufacturer Part Number=R0402_3K9_1%_0.0625W_100PPM, Mounted=Yes, Part Description="General Purpose Thick Film Chip Resistor", Part Number=R0402_3K9_1%_0.0625W_100PPM, Pin Count=2, PressFit=No, Sense=No, SMD=Yes, Socket=No, Status="Not Recommended", TC=±100ppm/°C
T_R73 T_R74: library part R0402_100R_1%_0.0625W_100PPM, "Resistor - 1%", Case=0402, Manufacturer=GENERIC, Manufacturer1 ComponentHeight=0.4mm, Manufacturer1 Example="YAGEO PHYCOMP", Manufacturer1 Part Number=232270671001L, Power=0.0625W, Tolerance=±1%, Author="CERN DEM JLC", Component Type=Standard, CreateDate=2007-12-03, HelpURL=\\cern.ch\dfs\Applications\Altium\Datasheets\R0402_Phycomp_RC0402.pdf, LatestRevisionDate=2012-10-17, Manufacturer Part Number=R0402_100R_1%_0.0625W_100PPM, Mounted=Yes, Part Description="General Purpose Thick Film Chip Resistor", Part Number=R0402_100R_1%_0.0625W_100PPM, Pin Count=2, SMD=Yes, Socket=No, Status="Not recommended", Table="Resistors SMD", TC=±100ppm/°C
T_R85 T_R96 T_R97: library part R0402_1K_1%_0.0625W_100PPM, "Resistor - 1%", Case=0402, Manufacturer=GENERIC, Manufacturer1 ComponentHeight=0.4mm, Manufacturer1 Example="YAGEO PHYCOMP", Manufacturer1 Part Number=232270671002L, Power=0.0625W, Tolerance=±1%, Author="CERN DEM JLC", Component Type=Standard, CreateDate=03.12.2007, HelpURL=\\cern.ch\dfs\Applications\Altium\Datasheets\R0402_Phycomp_RC0402.pdf, LatestRevisionDate=17.10.2012, Manufacturer Part Number=R0402_1K_1%_0.0625W_100PPM, Mounted=Yes, Part Description="General Purpose Thick Film Chip Resistor", Part Number=R0402_1K_1%_0.0625W_100PPM, Pin Count=2, PressFit=No, Sense=No, SMD=Yes, Socket=No, Status="Not Recommended", TC=±100ppm/°C
T_R89: library part R0603_1K3_1%_0.1W_100PPM, "Resistor - 1%", Case=0603, Manufacturer=GENERIC, Manufacturer1 ComponentHeight=0.55mm, Manufacturer1 Example="NIC COMPONENT", Manufacturer1 Part Number=NRC06F1301TRF, Power=0.1W, Tolerance=±1%, Author="CERN DEM JLC", Component Type=Standard, CreateDate=03.12.2007, HelpURL=\\cern.ch\dfs\Applications\Altium\Datasheets\R0603_NIC_NRC.pdf, LatestRevisionDate=13.03.2008, Manufacturer Part Number=R0603_1K3_1%_0.1W_100PPM, Mounted=Yes, Part Description="General Purpose Thick Film Chip Resistor", Part Number=R0603_1K3_1%_0.1W_100PPM, Pin Count=2, PressFit=No, Sense=No, SMD=Yes, Socket=No, Status=Preferred, TC=±100ppm/°C
T_R90 T_R91 T_R92 T_R93: library part R0402_2K2_1%_0.0625W_100PPM, "Resistor - 1%", Case=0402, Manufacturer=GENERIC, Manufacturer1 ComponentHeight=0.4mm, Manufacturer1 Example="YAGEO PHYCOMP", Manufacturer1 Part Number=232270672202L, Power=0.0625W, Tolerance=±1%, Author="CERN DEM JLC", Component Type=Standard, CreateDate=2007-12-03, HelpURL=\\cern.ch\dfs\Applications\Altium\Datasheets\R0402_Phycomp_RC0402.pdf, LatestRevisionDate=2012-10-17, Manufacturer Part Number=R0402_2K2_1%_0.0625W_100PPM, Mounted=Yes, Part Description="General Purpose Thick Film Chip Resistor", Part Number=R0402_2K2_1%_0.0625W_100PPM, Pin Count=2, SMD=Yes, Socket=No, Status="Not recommended", Table="Resistors SMD", TC=±100ppm/°C
T_R94: library part R0603_82K_1%_0.1W_100PPM, "Resistor - 1%", Case=0603, Manufacturer=GENERIC, Manufacturer1 ComponentHeight=0.55mm, Manufacturer1 Example="NIC COMPONENT", Manufacturer1 Part Number=NRC06F8202TRF, Power=0.1W, Tolerance=±1%, Author="CERN DEM JLC", Component Type=Standard, CreateDate=03.12.2007, HelpURL=\\cern.ch\dfs\Applications\Altium\Datasheets\R0603_NIC_NRC.pdf, LatestRevisionDate=13.03.2008, Manufacturer Part Number=R0603_82K_1%_0.1W_100PPM, Mounted=Yes, Part Description="General Purpose Thick Film Chip Resistor", Part Number=R0603_82K_1%_0.1W_100PPM, Pin Count=2, Sense=No, SMD=Yes, Socket=No, Status=Preferred, TC=±100ppm/°C
T_R95: library part R0402_33K_1%_0.0625W_100PPM, "Resistor - 1%", Case=0402, Manufacturer=GENERIC, Manufacturer1 ComponentHeight=0.4mm, Manufacturer1 Example="YAGEO PHYCOMP", Manufacturer1 Part Number=232270673303L, Power=0.0625W, Tolerance=±1%, Author="CERN DEM JLC", Component Type=Standard, CreateDate=03.12.2007, HelpURL=\\cern.ch\dfs\Applications\Altium\Datasheets\R0402_Phycomp_RC0402.pdf, LatestRevisionDate=17.10.2012, Manufacturer Part Number=R0402_33K_1%_0.0625W_100PPM, Mounted=Yes, Part Description="General Purpose Thick Film Chip Resistor", Part Number=R0402_33K_1%_0.0625W_100PPM, Pin Count=2, PressFit=No, Sense=No, SMD=Yes, Socket=No, Status="Not Recommended", TC=±100ppm/°C
T_SW1: library part SW_TYCO_1571983-4, "4 Ways SPST DIP Switch", Manufacturer=TYCO, Manufacturer Part Number="1571983-4 or GDH04S04", Author="CERN DEM JLC", Component Type=Standard, ComponentHeight=2.31mm, CreateDate=08/01/2009, Family=Switch, HelpURL=\\cern.ch\dfs\Applications\Altium\Datasheets\SW_TYCO_1571983-4.pdf, LatestRevisionDate=08/01/2009, Mounted=Yes, PackageDescription="Pitch 1.27mm,  Body 6.2x6.2mm, 4 Ways SPST Surface-Mount DIP Switch, TYCO GDH Series", Part Description="4 Way SPST SMD DIP Switch, Latched, Contact Rating 0.025A 24VDC", Part Number=SW_TYCO_1571983-4, Pin Count=8, PressFit=No, Sense=No, SMD=Yes, Socket=No, Status=None
T_T1 T_T2 T_T3 T_T4 T_T5 T_T6: "N-CHANNEL MOSFET WITH DIODE", Case=SOT23-3, Manufacturer="ON SEMICONDUCTOR", Manufacturer Part Number=BSS138L, Author="CERN DEM JLC", Bonding=No, Component Type=Standard, ComponentHeight=1.11mm, CreateDate=23.03.2009, Device=BSS138LT1G, HelpURL=\\cern.ch\dfs\Applications\Altium\Datasheets\BSS138LT1G.pdf, LatestRevisionDate=25.05.2022, Mounted=Yes, PackageDescription="SOT23, 0.95mm Pitch; 3 Pin, 1.40mm W X 3.00mm L X 1.10mm H body, IPC Medium Density", Part Description="50V, 200mA N-Channel Enhancement Mode Field-Effect Transistor", Part Number=BSS138LT1G, Pin Count=3, PressFit=No, Sense=No, SMD=Yes, Socket=No
T_T7: "P-CHANNEL MOSFET WITH DIODE", Case=SOT23-3, Manufacturer="DIODES INCORPORATED", Author="CERN DEM HF", Bonding=No, Component Type=Standard, ComponentHeight=1.4mm, CreateDate=24.09.2025, Device=DMP2045U, HelpURL=\\cern.ch\dfs\Applications\Altium\Datasheets\DMP2045U.pdf, LatestRevisionDate=24.09.2025, Manufacturer Part Number=DMP2045U, Mounted=Yes, PackageDescription="SOT23, 0.95mm Pitch; 3 Pin, 1.40mm W X 3.00mm L X 1.10mm H body, IPC Medium Density", Part Description="20V, 4.3A, P-Channel Enhancement Mode MOSFET", Part Number=DMP2045U, Pin Count=3, PressFit=No, Sense=No, SMD=Yes, Socket=No
T_T8: "45V, 100mA PNP General Purpose Double Transistor", Case=SOT666, Manufacturer="NXP SEMICONDUCTORS", Author="CERN DEM JLC", Bonding=No, Component Type=Standard, ComponentHeight=0.6mm, CreateDate=01/12/2011, Device=BC857BV, HelpURL=\\cern.ch\dfs\Applications\Altium\Datasheets\BC857BV.pdf, LatestRevisionDate=01/12/2011, Manufacturer Part Number=BC857BV, Mounted=Yes, PackageDescription="SOTFL (SOT666), 0.50mm, Pitch; 6 Pin, 1.20mm W X 1.60mm L X 0.60mm H Body, IPC Medium Density", Part Description="-45V -100mA PNP General Purpose Double Transistor", Part Number=BC857BV, Pin Count=6, PressFit=No, Sense=No, SMD=Yes, Socket=No
T_TP1 T_TP2 T_TP3 T_TP4 T_TP5 T_TP6 T_TP7 T_TP8 T_TP9: library part SMD_PAD_1.27X1.27MM, Author="CERN DEM JLC", Component Type="Standard (No BOM)", ComponentHeight=0mm, CreateDate=12.01.2008, Family="Test Point", HelpURL=Undefined, LatestRevisionDate=12.01.2008, Mounted=No, PackageDescription="1.27mm x 1.27mm PCB Copper Area (SMD Test Point)", Part Description="1.27mm x 1.27mm PCB Copper Area (SMD Test Point)", Part Number=SMD_PAD_1.27X1.27MM, Pin Count=1, Sense=No, SMD=Yes, Socket=No, Status=None
T_TR1: library part XFMR_MINI-CIRCUITS_TCM2-1T, "50 Ohms 3 to 300MHz RF Transformer", Manufacturer=MINI-CIRCUITS, Manufacturer Part Number=TCM2-1T, Power=0.25W, Author="CERN DEM HF", Component Type=Standard, ComponentHeight=4.06mm, CreateDate=30.05.2023, HelpURL=\\cern.ch\dfs\Applications\Altium\Datasheets\XFMR_MINI-CIRCUITS_TCM2-1T.pdf, LatestRevisionDate=30.05.2023, Mounted=Yes, Part Description="50 Ohms 3 to 300MHz RF Transformer", Part Number=XFMR_MINI-CIRCUITS_TCM2-1T, Pin Count=6, Sense=No, SMD=Yes, Socket=No, Status=None
T_U1: library part CMP-0962-00001-1, "iCE40 HX8K Series FPGA Family, 7680 Logic Cells, 1.2 V Core, 128 K Embedded RAM Bits, 256-ball caBGA, Pb-Free, Tray", Manufacturer="Lattice Semiconductor", Supply Voltage=1.2V, Code_JEDEC=MO-275, ComponentLink1Description="Manufacturer URL", ComponentLink1URL=http://www.latticesemi.com/en, ComponentLink2Description=Datasheet, ComponentLink2URL=http://www.latticesemi.com/~/media/Documents/DataSheets/iCE/iCE40LPHXFamilyDataSheet.pdf, ComponentLink3Description="Package Specification", ComponentLink3URL=http://www.latticesemi.com/lit/docs/package/pkg.pdf, DatasheetVersion="Rev. 02.9", Embedded RAM Bits=128K, Logic Cells=7680, Manufacturer Part Number=ICE40HX8K-CT256, Mounting Technology="Surface Mount", PackageDescription="256-Ball Chip Array Ball Grid Array, Body 14 x 14 mm, Pitch 0.8 mm", PackageReference=caBGA-256, PackageVersion="Rev. 03.9, 02/2013", Packing=Tray, Phase-Locked Loops=2, RoHS=TRUE

## Via types
v1: diameter 0.5, hole 0.25, L1 to L4, tented both sides, 289 vias
v2: diameter 1, hole 0.45, L1 to L4, tented both sides, 28 vias
v3: diameter 0.9, hole 0.45, L1 to L4, tented both sides, 5 vias
v4: diameter 0.6, hole 0.3, L1 to L4, tented both sides, 3 vias

## Nets (pads, with @x,y where several pads share a name; then routed paths per layer and width w, separated by ;. In a path a pad name is that pad's centre, name@x,y a point inside that pad or via, vN(x,y) a via of type N, cw(c..) or ccw(c..) an arc to the next point about the centre after c; other vN are vias at no path point)
BGA0: T_D3.3 T_J4.C3 T_R13.2 | length 48.2
  L1 w0.125: 182.47,7.535 183.665,7.535 184.098,7.102 186.417,7.102 186.505,7.015 186.505,6.906 186.733,6.678 187.391,6.678 187.788,6.28 189.499,6.28 190.7,5.078 190.7,2 195.385,-2.685 215.501,-2.685 216.438,-1.749 216.438,0.656 215.189,1.905 213.046,1.905 T_J4.C3@212,2.95
BGA1: T_D3.1 T_J4.F3 T_R14.2 | length 29.9
  L1 w0.125: 182.47,8.535 182.47,8.515 182.697,8.287 182.717,8.287 182.902,8.102 T_D3.1@186.252,8.102 ; v1(185.407,8.609) 185.442,8.574 185.783,8.574 186.016,8.341 186.016,8.186 T_D3.1@186.045,8.157 ; v1(193.8,4.6) 194.217,4.183 195.319,4.183 v1(195.337,4.166)
  L4 w0.125: v1(185.407,8.609) 185.427,8.609 186.836,7.2 189,7.2 189.367,7.567 190.533,7.567 193.466,4.634 193.766,4.634 v1(193.8,4.6) ; v1(195.337,4.166) 202,4.098 206.652,4.098 T_J4.F3@207.8,2.95
BGA2: T_D3.6 T_J4.I3 T_R16.2 | length 24.2
  L1 w0.125: 182.457,9.529 182.457,9.509 182.685,9.282 182.705,9.282 182.845,9.142 185.633,9.142 186.084,8.691 187.108,8.691 187.507,8.291 187.507,8.287 187.595,8.2 188.709,8.2 v1(189.79,7.119) ; v1(193.828,3.429) 193.84,3.416 195.311,3.416 v1(195.337,3.391)
  L4 w0.125: v1(189.79,7.119) 189.8,7.109 190.148,7.109 v1(193.828,3.429) ; v1(195.337,3.391) 197.785,3.447 197.835,3.448 197.872,3.485 198.173,3.8 cw(c198.262,3.712) 198.174,3.801 198.21,3.837 202.714,3.837 T_J4.I3@203.6,2.95
BGA3: T_D3.4 T_J4.L3 T_R18.2 | length 21.6
  L1 w0.125: 182.425,10.439 182.425,10.419 182.652,10.192 182.672,10.192 182.864,10 v1(183.5,10) ; v1(188.341,6.719) 188.012,7.048 188.012,7.177 188.098,7.263 188.233,7.263 188.44,7.47 188.44,7.64 v1(188.512,7.712) ; v1(193.797,2.599) 196.039,2.6 v1(196.041,2.603)
  L4 w0.125: v1(183.5,10) 184.358,9.142 185.772,9.142 187.195,7.719 188.505,7.719 v1(188.512,7.712) ; v1(188.341,6.719) 188.443,6.719 188.599,6.563 189.834,6.563 v1(193.797,2.599) ; v1(196.041,2.603) 196.044,2.6 197.8,2.6 198.15,2.95 T_J4.L3@199.4,2.95
BP_CLK.CLK_N: T_J4.F4 T_R12.1
BP_CLK.CLK_P: T_J4.E4 T_R11.1
BP_I2C.SCL: T_D2.3 T_IC8.6 T_J4.B2 | length 58.5
  L1 w0.125: v1(181.291,16.289) 181.291,16.827 181.282,16.836 181.282,17.582 181.442,17.742 181.442,19.985 181.3,20.128 v1(181.3,22.6) ; v1(183.663,4.944) 183.764,4.944 183.877,4.831 T_D2.3@186.24,4.831 186.24,4.298 v1(186.265,4.273) ; v1(184,22.6) 184,25.743 184.042,25.785
  L4 w0.125: v1(181.291,16.289) 182.91,14.67 182.91,5.861 183.591,5.18 183.591,5.016 v1(183.663,4.944) ; v1(181.3,22.6) v1(184,22.6) ; v1(186.265,4.273) 187.642,4.273 188.269,4.9 189.122,4.9 194.217,-0.195 197.1,-0.195 213.233,-0.195 213.486,0.058 213.486,0.936 T_J4.B2@213.5,0.95
BP_I2C.SDA: T_D2.1 T_IC8.7 T_J4.C2 | length 58.7
  L1 w0.125: v1(181.726,23.936) 181.726,22.795 181.74,22.782 181.74,22.418 181.726,22.405 181.726,21.107 182.031,20.803 182.031,20.047 182.092,19.985 182.092,16.595 v1(182.099,16.589) ; v1(182.039,5.535) 183.235,5.535 183.531,5.831 T_D2.1@186.24,5.831 186.184,5.887 186.184,6.096 186.004,6.276 185.661,6.276 v1(185.648,6.289) ; v1(183.377,23.936) 183.377,25.77 183.392,25.785
  L4 w0.125: v1(181.726,23.936) 181.798,23.865 181.986,23.865 181.987,23.863 183.203,23.863 183.276,23.936 v1(183.377,23.936) ; v1(182.039,5.535) 182,5.575 182,6.535 182,13.308 180.852,14.456 180.852,16.107 180.852,16.677 181,16.826 181.838,16.826 182.074,16.589 v1(182.099,16.589) ; v1(185.648,6.289) 185.72,6.218 185.873,6.218 185.909,6.181 186.619,6.181 187.5,5.3 189.371,5.3 194.595,0.076 197.4,0.076 211.227,0.076 T_J4.C2@212.101,0.95
BP_IO.LVDS_N0: T_J4.E3 T_R51.1 | length 69
  L1 w0.14: v1(196.491,54.861) 196.466,54.861 196.229,55.099 195.954,55.099 195.915,55.137 195.382,55.137 195.3,55.055 195.3,5.463 198.633,2.13 209.541,2.13 209.751,2.34 209.751,2.456 209.257,2.95 T_J4.E3@209.2,2.95
  L4 w0.14: 195.47,54.8 195.47,54.82 195.75,55.1 196.155,55.1 196.393,54.861 v1(196.491,54.861)
BP_IO.LVDS_N1: T_J4.B3 T_R52.1 | length 82.3
  L1 w0.14: v1(206.136,39.457) 206.118,39.44 205.783,39.44 205.676,39.333 205.676,32.189 206.112,31.753 206.112,23.884 206.35,23.647 v1(206.35,23.622)
  L4 w0.14: 195.018,2.493 194.691,2.819 194.691,10.467 206.112,21.888 206.112,23.36 206.35,23.597 v1(206.35,23.622) ; 195.018,2.492 195.02,2.491 195.441,2.07 213.681,2.07 213.951,2.34 213.951,2.456 213.457,2.95 T_J4.B3@213.401,2.95 ; 195.47,52.2 195.47,52.22 195.75,52.5 196.704,52.5 201.5,47.704 201.5,42.297 204.619,39.178 205.521,39.178 205.783,39.44 206.118,39.44 v1(206.136,39.457)
BP_IO.LVDS_N2: T_J4.C4 T_R53.1 | length 57.9
  L4 w0.14: 195.47,47.189 195.47,47.209 195.75,47.489 196.311,47.489 199.6,44.2 199.6,41.149 205.946,34.803 212.097,34.803 215.721,31.179 215.721,6.71 215.081,6.07 213.122,6.07 212.651,5.599 212.651,5.359 212.242,4.95 T_J4.C4@212.101,4.95
BP_IO.LVDS_N3: T_J4.L4 T_R54.1 | length 46.1
  L1 w0.14: v1(197.884,42.937) 197.86,42.937 197.622,42.699 196.902,42.699 196.645,42.442 196.645,41.631 197.188,41.088 198.288,41.088 198.543,40.833 198.543,13.547 197.1,12.104 197.1,6.718 198.061,5.757 199.854,5.757 200.051,5.56 200.051,5.444 199.557,4.95 T_J4.L4@199.5,4.95
  L4 w0.14: 195.47,43 195.47,42.98 195.75,42.7 197.068,42.7 197.622,42.699 197.86,42.937 v1(197.884,42.937)
BP_IO.LVDS_N4: T_J4.I4 T_R55.1 | length 46.1
  L1 w0.14: v1(197.3,39.557) 197.203,39.557 197.023,39.737 196.954,39.737 196.94,39.751 196.824,39.751 196.6,39.526 196.6,13.542 196.3,13.242 196.3,6.3 198.47,4.13 204.041,4.13 204.251,4.34 204.251,4.456 203.757,4.95 T_J4.I4@203.701,4.95
  L4 w0.14: 195.47,39.5 195.47,39.52 195.75,39.8 196.767,39.8 196.772,39.795 197.038,39.795 197.275,39.557 v1(197.3,39.557)
BP_IO.LVDS_N5: T_J4.K5 T_R56.1 | length 38
  L1 w0.14: v1(199.625,36.1) 199.625,36.075 199.863,35.838 199.863,12.631 198.2,10.969 198.2,8.412 198.814,7.799 201.112,7.799 201.351,7.56 201.351,7.444 200.857,6.95 T_J4.K5@200.8,6.95
  L4 w0.14: 195.47,35.84 195.47,35.82 195.77,35.52 199.695,35.52 199.863,35.687 199.863,35.838 199.625,36.075 v1(199.625,36.1)
BP_IO.LVDS_N6: T_J4.H5 T_R57.1 | length 53.1
  L1 w0.14: T_J4.H5@205.001,6.95 205.142,6.95 205.551,7.359 205.551,7.599 206.075,8.123 215.234,8.123 215.721,8.61 215.721,20.154 215.2,20.675 215.2,28.21 211.71,31.7 v1(211.3,31.7)
  L4 w0.14: 195.47,32 195.47,32.02 195.75,32.3 196.49,32.3 196.492,32.302 211.034,32.302 211.283,32.053 211.283,31.717 v1(211.3,31.7)
BP_IO.LVDS_N7: T_J4.F6 T_R58.1 | length 32.7
  L1 w0.14: v1(207.546,27.688) 207.563,27.671 207.899,27.671 208.451,27.119 208.451,18.508 208.451,9.5 T_J4.F6@207.9,8.95
  L4 w0.14: 195.47,29.194 195.47,29.214 195.77,29.514 206.056,29.514 207.528,28.041 207.528,27.705 v1(207.546,27.688)
BP_IO.LVDS_N8: T_J4.C6 T_R59.1 | length 86
  L1 w0.14: v1(203.988,57.988) 204.005,57.971 204.341,57.971 205.359,56.952 205.359,49.53 202.3,46.471 202.3,42.597 203.397,41.5 206.557,41.5 208.6,39.457 208.6,31.176 212.651,27.125 212.651,9.5 T_J4.C6@212.101,8.95
  L4 w0.14: 180.404,54.889 180.539,54.889 180.77,55.12 181.153,55.12 181.686,55.653 181.686,58.776 182.899,59.988 202.323,59.988 203.97,58.341 203.97,58.006 v1(203.988,57.988)
BP_IO.LVDS_N9: T_J4.L6 T_R60.1 | length 76.7
  L1 w0.14: v1(187.408,49.381) 187.389,49.4 187.056,49.4 186.877,49.58 186.877,50.177 187.4,50.7 187.4,52.116 187.854,52.57 189.494,52.57 190.2,53.276 190.2,57.061 191,57.861 196.315,57.861 199.395,54.781 199.395,41.381 201.7,39.076 201.7,12.005 200.051,10.356 200.051,9.5 T_J4.L6@199.5,8.95
  L4 w0.14: 180.37,51.14 180.37,51.12 180.67,50.82 181.28,50.82 182,50.1 186.4,50.1 187.078,49.422 187.367,49.422 v1(187.408,49.381)
BP_IO.LVDS_N10: T_J4.I6 T_R61.1 | length 85.5
  L1 w0.14: v1(186.8,46.8) 186.8,46.825 186.562,47.062 186.562,48.197 186.165,48.595 186.165,53.065 187.3,54.2 187.3,58.2 188.688,59.588 199.677,59.588 200.99,58.275 200.99,41.885 203.3,39.576 203.3,20.276 204.25,19.326 204.25,9.409 203.791,8.95 T_J4.I6@203.7,8.95
  L4 w0.14: 180.277,46.761 180.497,46.981 180.497,47.002 180.579,47.084 182.592,47.084 183.676,46 186.3,46 186.562,46.263 186.562,46.538 186.8,46.775 v1(186.8,46.8)
BP_IO.LVDS_N11: T_J5.E1 T_R62.1 | length 55.8
  L1 w0.14: v1(184.3,44.1) 184.3,44.123 184.539,44.362 184.539,44.934 183.407,46.065 183.407,49.732 184.5,50.824 184.5,61.524 195.076,72.1 207.327,72.1 209.751,74.524 209.751,75.263 209.751,75.503 209.304,75.95 T_J5.E1@209.2,75.95
  L4 w0.14: 180.366,42.723 180.567,42.723 180.639,42.651 180.927,42.651 181.844,43.568 184.309,43.568 184.463,43.722 184.463,43.84 184.3,44.003 v1(184.3,44.1)
BP_IO.LVDS_N12: T_J5.B1 T_R63.1 | length 67.1
  L1 w0.14: v1(185.7,39) 185.631,39.069 185.631,39.448 185.4,39.679 185.4,40.724 186.3,41.624 186.3,44.619 184.4,46.519 184.4,48.424 185.17,49.194 185.17,54.689 186,55.519 186,59.324 188.776,62.1 204.376,62.1 206.3,64.024 206.3,69.024 207.976,70.7 210.376,70.7 213.951,74.275 213.951,75.4 T_J5.B1@213.401,75.95
  L4 w0.14: 180.378,39.218 180.378,39.238 180.666,39.525 185.511,39.525 185.683,39.353 185.683,39.017 v1(185.7,39)
BP_IO.LVDS_N13: T_J5.K1 T_R64.1 | length 58.2
  L1 w0.14: v1(181.32,35.303) 181.344,35.303 181.582,35.066 182.527,35.066 183.088,35.627 183.088,42.012 181.6,43.5 181.6,51.524 182.9,52.824 182.9,66.052 191.443,74.595 200.521,74.595 201.351,75.425 201.351,75.541 200.942,75.95 T_J5.K1@200.8,75.95
  L4 w0.14: 180.378,35.565 180.378,35.341 180.654,35.066 181.058,35.066 181.295,35.303 v1(181.32,35.303)
BP_IO.LVDS_N14: T_J5.H1 T_R65.1 | length 65.8
  L1 w0.14: v1(184.179,31.975) 184.143,31.975 183.917,32.2 183.469,32.2 183.1,32.569 183.1,33.397 184.483,34.78 184.483,42.217 182.5,44.2 182.5,50.624 183.7,51.824 183.7,63.624 193.676,73.6 203.726,73.6 205.551,75.425 205.551,75.541 205.142,75.95 T_J5.H1@205.001,75.95
  L4 w0.14: 180.404,31.954 180.662,32.212 183.917,32.212 184.155,31.975 v1(184.179,31.975)
BP_IO.LVDS_N15: T_J4.F2 T_R66.2 | length 72.2
  L1 w0.14: v1(186.9,25.6) 186.875,25.6 186.638,25.837 186.212,25.837 185.959,25.585 185.959,21.541 188.985,18.515 191.727,18.515 193.5,16.742 193.5,6.4 193.202,6.102 193.202,1.489 196.293,-1.602 196.743,-1.87 215.416,-1.87 215.646,-1.64 215.646,-0.446 215.373,-0.173 208.8,-0.173 208.45,0.177 208.45,0.541 208.042,0.949 T_J4.F2@207.9,0.95
  L4 w0.14: 180.429,29.108 180.429,29.272 180.69,29.533 180.69,29.553 180.772,29.635 181.165,29.635 184.963,25.837 186.638,25.837 186.875,25.6 v1(186.9,25.6)
BP_IO.LVDS_P0: T_J4.D3 T_R35.1 | length 70.5
  L1 w0.14: v1(196.491,55.636) 196.466,55.636 196.229,55.399 196.078,55.399 196.039,55.437 195.258,55.437 195,55.18 195,5.339 198.509,1.83 209.665,1.83 210.051,2.216 210.051,2.456 210.545,2.95 T_J4.D3@210.6,2.95
  L4 w0.14: 195.47,55.7 195.47,55.68 195.75,55.4 196.157,55.4 196.393,55.636 v1(196.491,55.636)
BP_IO.LVDS_P1: T_J4.A3 T_R36.1 | length 83.3
  L1 w0.14: v1(205.575,23.622) 205.575,23.647 205.812,23.884 205.812,31.629 205.376,32.065 205.376,39.457 205.57,39.652 205.57,39.988 v1(205.588,40.005)
  L4 w0.14: 194.806,2.281 194.391,2.695 194.391,10.591 205.812,22.012 205.812,23.36 205.575,23.597 v1(205.575,23.622) ; 194.806,2.28 195.228,1.858 195.316,1.77 213.805,1.77 214.251,2.216 214.251,2.456 214.745,2.95 T_J4.A3@214.801,2.95 ; 195.47,53.1 195.47,53.08 195.75,52.8 196.829,52.8 201.8,47.829 201.8,42.421 204.743,39.478 205.397,39.478 205.57,39.652 205.57,39.988 v1(205.588,40.005)
BP_IO.LVDS_P2: T_J4.B4 T_R37.1 | length 58.4
  L4 w0.14: 195.47,48.089 195.47,48.069 195.75,47.789 196.435,47.789 199.9,44.324 199.9,41.273 206.07,35.103 212.221,35.103 216.021,31.303 216.021,6.586 215.205,5.77 213.246,5.77 212.951,5.475 212.951,5.359 213.36,4.95 T_J4.B4@213.5,4.95
BP_IO.LVDS_P3: T_J4.K4 T_R38.1 | length 45.7
  L1 w0.14: v1(197.884,42.162) 197.86,42.162 197.622,42.399 197.027,42.399 196.945,42.317 196.945,41.755 197.312,41.388 198.412,41.388 198.843,40.957 198.843,13.423 197.4,11.98 197.4,6.843 198.185,6.057 199.978,6.057 200.351,5.684 200.351,5.444 200.845,4.95 T_J4.K4@200.9,4.95
  L4 w0.14: 195.47,42.1 195.47,42.12 195.75,42.4 196.944,42.4 197.622,42.399 197.86,42.162 v1(197.884,42.162)
BP_IO.LVDS_P4: T_J4.H4 T_R39.1 | length 47.6
  L1 w0.14: v1(197.31,40.332) 197.269,40.332 196.987,40.051 196.7,40.051 196.3,39.65 196.3,13.666 196,13.366 196,6.176 198.346,3.83 204.165,3.83 204.551,4.216 204.551,4.456 205.045,4.95 T_J4.H4@205.1,4.95
  L4 w0.14: 195.47,40.4 195.47,40.38 195.75,40.1 196.891,40.1 196.896,40.095 197.048,40.095 197.285,40.332 v1(197.31,40.332)
BP_IO.LVDS_P5: T_J4.J5 T_R40.1 | length 38.5
  L1 w0.14: v1(200.4,36.1) 200.4,36.075 200.163,35.838 200.163,12.507 198.5,10.845 198.5,8.537 198.938,8.099 201.236,8.099 201.651,7.684 201.651,7.444 202.145,6.95 T_J4.J5@202.2,6.95
  L4 w0.14: 195.47,34.9 195.47,34.92 195.77,35.22 199.82,35.22 200.163,35.563 200.163,35.838 200.4,36.075 v1(200.4,36.1)
BP_IO.LVDS_P6: T_J4.G5 T_R41.1 | length 53.6
  L1 w0.14: T_J4.G5@206.401,6.95 206.26,6.95 205.851,7.359 205.851,7.475 206.199,7.823 215.358,7.823 216.021,8.486 216.021,20.278 215.5,20.799 215.5,28.334 211.902,31.932 211.902,32.194 v1(211.848,32.248)
  L4 w0.14: 195.47,32.9 195.47,32.88 195.75,32.6 196.366,32.6 196.368,32.602 211.158,32.602 211.495,32.265 211.831,32.265 v1(211.848,32.248)